# Altium PCB 175-00003, rev 2, Sinistro ASP.PcbDoc (part 4 of 5)
Units mil, origin at the board's own origin, x right, y up, seen from the top; angles counter-clockwise.
Board outline 5905.51 x 4330.71 mil, 8 copper layers (Top Layer (.GTL), MidLayer1 (.G1), +28V and VCC (.GP1), A and D grounds (.GP2), Earth GND (.GP3), +5ANA (.GP4), -5ANA (.GP5), Bottom Layer (.GBL)); 381 components, 275 nets, 1751 pads, 519 vias.
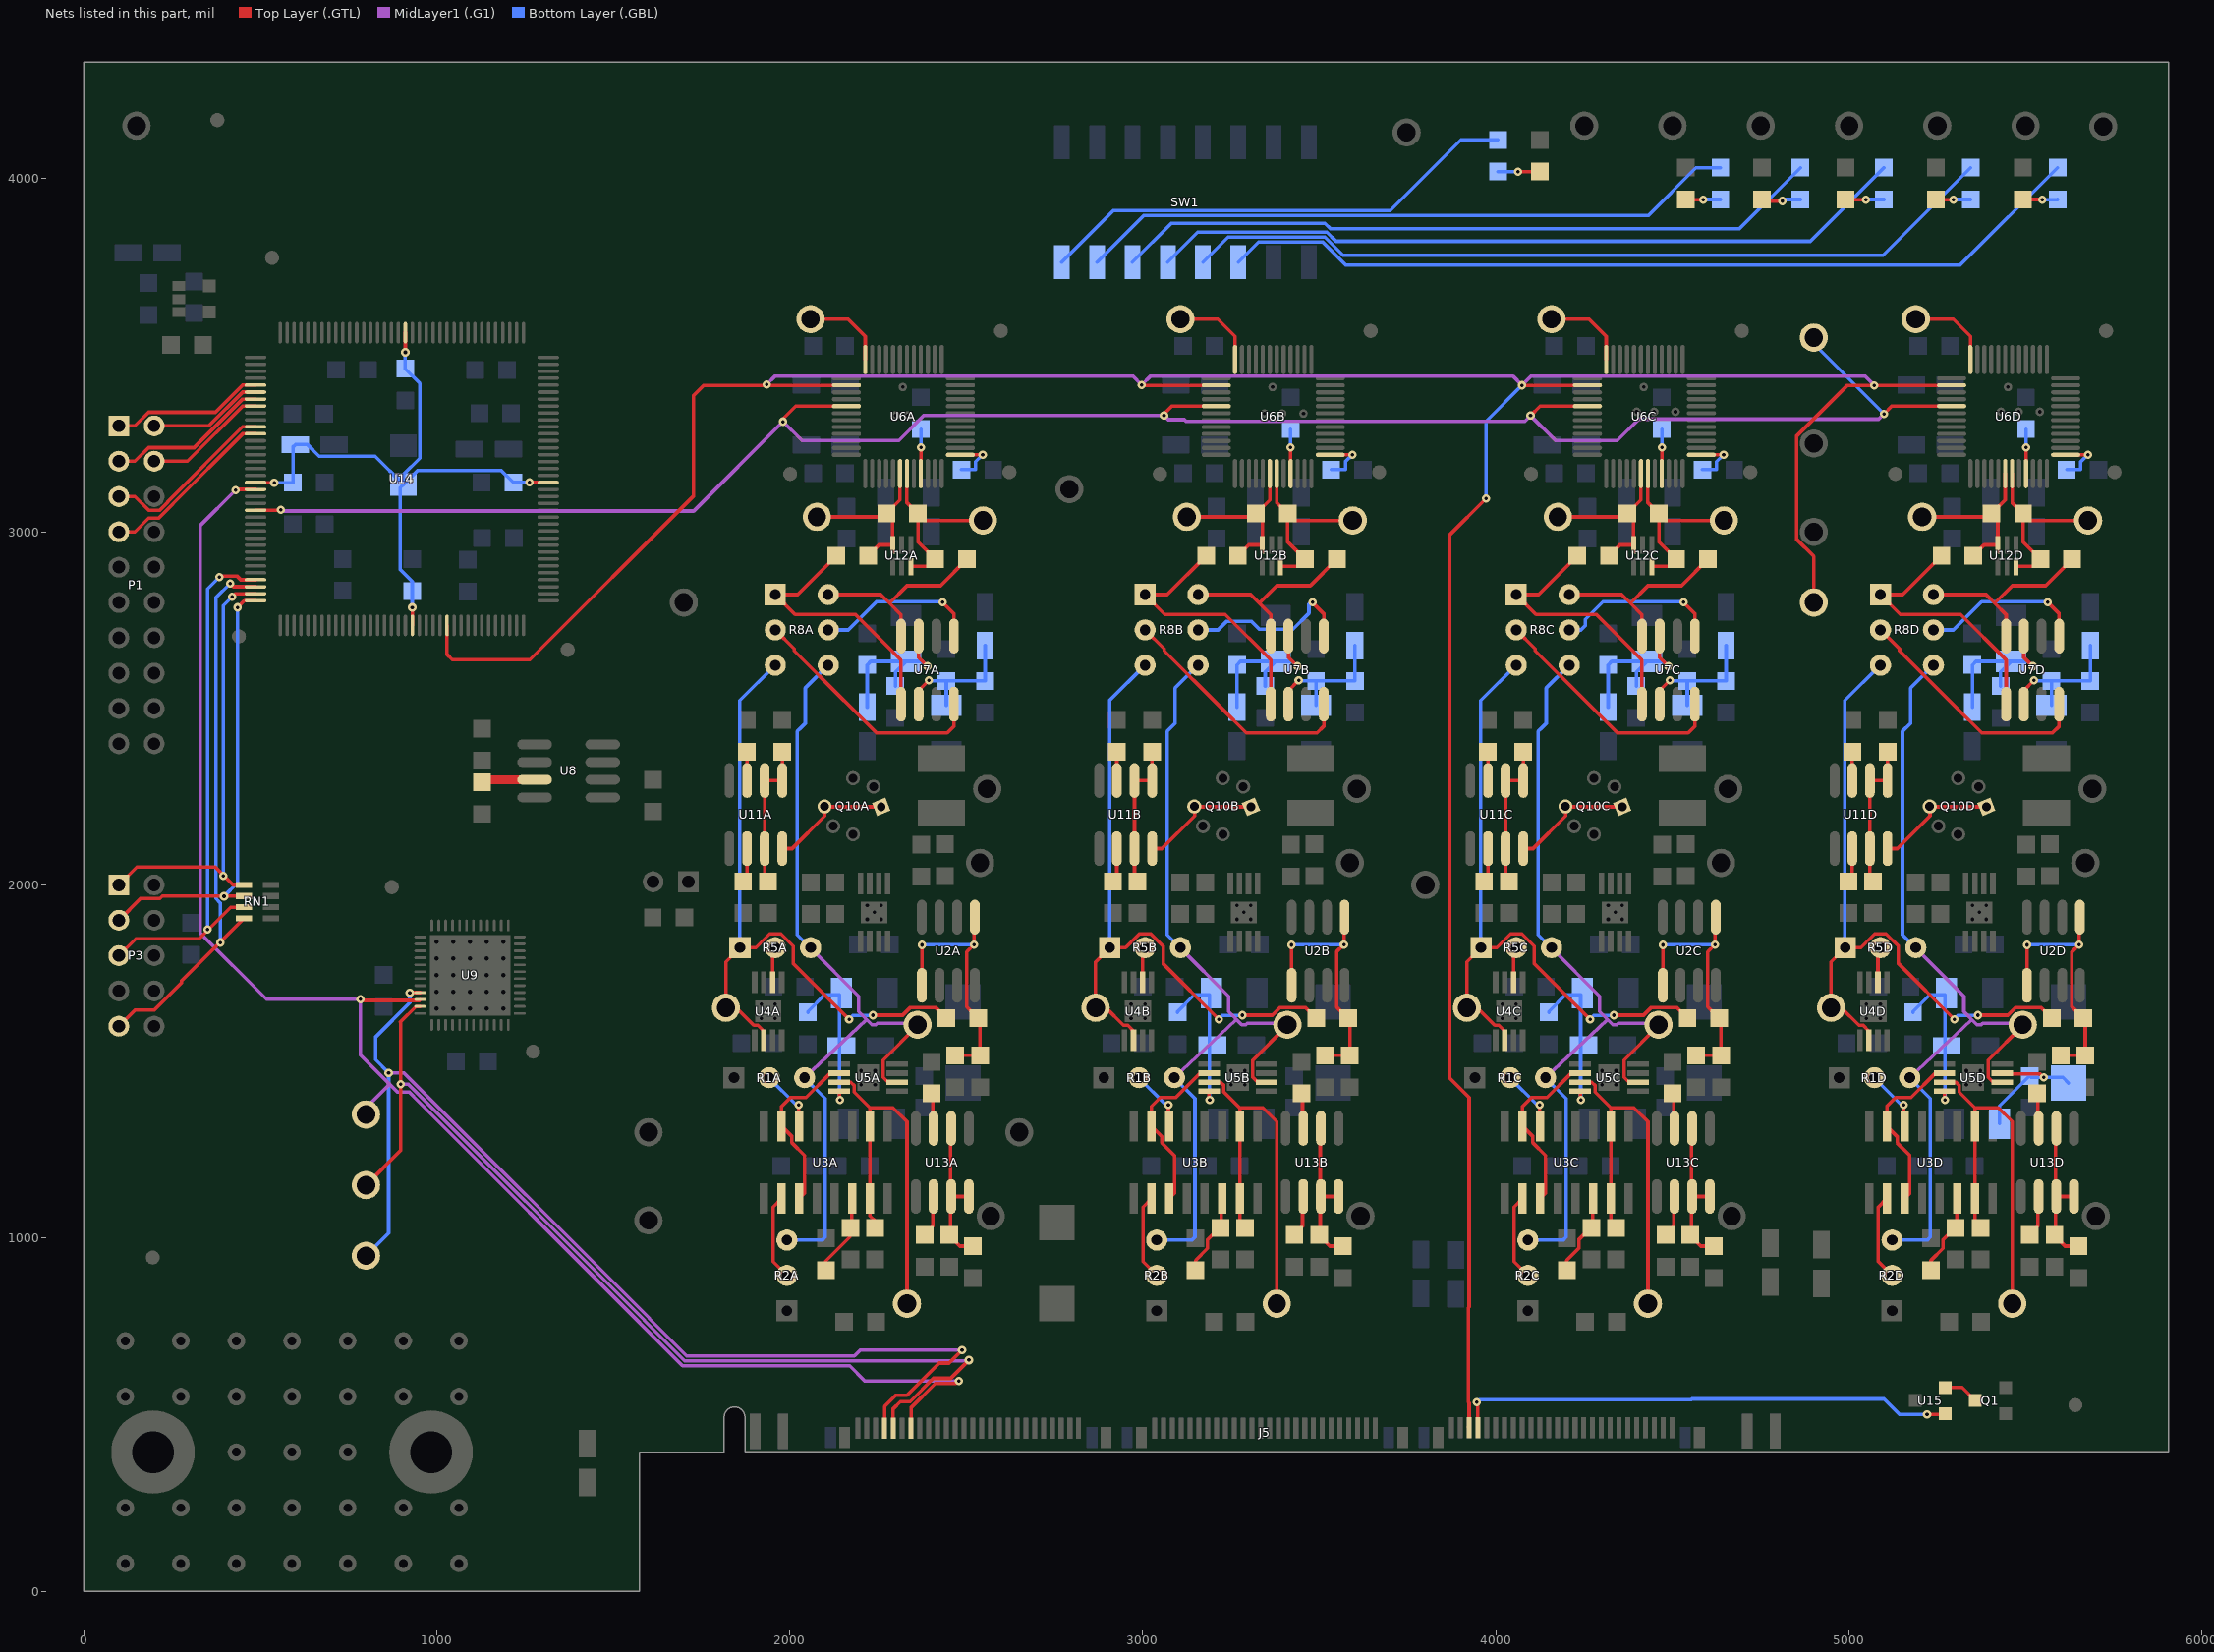
[diagram p10: the nets of this part, all layers, seen from the top]

## Via types
v1: diameter 24, hole 10, Top Layer (.GTL) to Bottom Layer (.GBL), tented both sides, 519 vias

## Nets (pads, with @x,y where several pads share a name; then routed paths per layer and width w, separated by ;. In a path a pad name is that pad's centre, name@x,y a point inside that pad or via, vN(x,y) a via of type N, cw(c..) or ccw(c..) an arc to the next point about the centre after c; other vN are vias at no path point) (continued)
NetC9D_1: C9D.1 C10D.POS L1D.1 U5D.7 | length 412.7
  Top Layer (.GTL) w10: U5D.7@5433.71,1467.12 5435.5,1465.32 5541.02,1465.32 v1(5551.02,1455.32)
  MidLayer1 (.G1) w10: v1@5550.28,1455.05 5551.28,1455.05 v1@5550.28,1455.05
  Bottom Layer (.GBL) w10: L1D.1@5426.28,1324.05 5426.28,1374.05 C9D.1@5511.28,1459.05 5515.28,1455.05 5550.28,1455.05 5551.28,1455.05 5605.28,1455.05 C10D.POS@5621.28,1439.05
NetC12A_2: C12A.2 R13A.1 U3A.14 | length 234.9
  Top Layer (.GTL) w10: R13A.1@2102.09,909.32 2102.09,935.09 2170.09,1003.09 C12A.2@2170.09,1029.32 ; C12A.2@2172.09,1029.32 C12A.2@2170.09,1029.32 ; U3A.14@2175.09,1111.96 2175.09,1034.32 C12A.2@2170.09,1029.32
NetC12B_2: C12B.2 R13B.1 U3B.14 | length 234.9
  Top Layer (.GTL) w10: R13B.1@3149.34,909.32 3149.34,936.59 3183.34,970.59 3183.34,995.32 C12B.2@3217.34,1029.32 ; C12B.2@3219.34,1029.32 C12B.2@3217.34,1029.32 ; U3B.14@3222.34,1111.96 3222.34,1034.32 C12B.2@3217.34,1029.32
NetC12C_2: C12C.2 R13C.1 U3C.14 | length 234.9
  Top Layer (.GTL) w10: R13C.1@4200.52,909.32 4200.52,936.59 4234.52,970.59 4234.52,995.32 C12C.2@4268.52,1029.32 ; C12C.2@4270.52,1029.32 C12C.2@4268.52,1029.32 ; U3C.14@4273.52,1111.96 4273.52,1034.32 C12C.2@4268.52,1029.32
NetC12D_2: C12D.2 R13D.1 U3D.14 | length 234.9
  Top Layer (.GTL) w10: R13D.1@5232.02,909.32 5232.02,936.59 5266.02,970.59 5266.02,995.32 C12D.2@5300.02,1029.32 ; C12D.2@5302.02,1029.32 C12D.2@5300.02,1029.32 ; U3D.14@5305.02,1111.96 5305.02,1034.32 C12D.2@5300.02,1029.32
NetC13A_2: C13A.2 C15A.2 L2A.1 U5A.4 | length 435.8
  Top Layer (.GTL) w10: U5A.4@2140.4,1415.94 2140.4,1393.01 v1(2142.09,1391.32)
  Bottom Layer (.GBL) w10: C13A.2@2051.36,1639.05 2051.36,1642.05 2098.36,1689.05 2141.36,1689.05 v1@2141.36,1391.05
NetC13B_2: C13B.2 C15B.2 L2B.1 U5B.4 | length 435.8
  Top Layer (.GTL) w10: U5B.4@3187.65,1415.94 3187.65,1393.01 v1(3189.34,1391.32)
  Bottom Layer (.GBL) w10: C13B.2@3098.61,1639.05 3098.61,1642.05 3145.61,1689.05 3188.61,1689.05 v1@3188.61,1391.05
NetC13C_2: C13C.2 C15C.2 L2C.1 U5C.4 | length 435.8
  Top Layer (.GTL) w10: U5C.4@4238.83,1415.94 4238.83,1393.01 v1(4240.52,1391.32)
  Bottom Layer (.GBL) w10: C13C.2@4149.79,1639.05 4149.79,1642.05 4196.79,1689.05 4239.79,1689.05 v1@4239.79,1391.05
NetC13D_2: C13D.2 C15D.2 L2D.1 U5D.4 | length 435.8
  Top Layer (.GTL) w10: U5D.4@5270.32,1415.94 5270.32,1393.01 v1(5272.02,1391.32)
  Bottom Layer (.GBL) w10: C13D.2@5181.28,1639.05 5181.28,1642.05 5228.28,1689.05 5271.28,1689.05 v1@5271.28,1391.05
NetC16A_1: C16A.1 C18A.1 C19A.1 L3A.2 U7A.3 | length 478.2
  Top Layer (.GTL) w10: U7A.3@2365.09,2704.78 2365.09,2644.32 v1(2390.09,2619.32)
  Bottom Layer (.GBL) w10: C16A.1@2219.36,2503.05 C19A.1@2219.36,2623.05 2229.36,2633.05 L3A.2@2329.36,2633.05 ; C18A.1@2299.36,2563.05 2299.36,2603.05 L3A.2@2329.36,2633.05 ; v1@2389.36,2619.05 2375.36,2633.05 L3A.2@2329.36,2633.05
NetC16B_1: C16B.1 C18B.1 C19B.1 L3B.2 U7B.3 | length 478.2
  Top Layer (.GTL) w10: U7B.3@3412.34,2704.78 3412.34,2644.32 v1(3437.34,2619.32)
  Bottom Layer (.GBL) w10: C16B.1@3266.61,2503.05 C19B.1@3266.61,2623.05 3276.61,2633.05 L3B.2@3376.61,2633.05 ; C18B.1@3346.61,2563.05 3346.61,2603.05 L3B.2@3376.61,2633.05 ; v1@3436.61,2619.05 3422.61,2633.05 L3B.2@3376.61,2633.05
NetC16C_1: C16C.1 C18C.1 C19C.1 L3C.2 U7C.3 | length 478.2
  Top Layer (.GTL) w10: U7C.3@4463.52,2704.78 4463.52,2644.32 v1(4488.52,2619.32)
  Bottom Layer (.GBL) w10: C16C.1@4317.79,2503.05 C19C.1@4317.79,2623.05 4327.79,2633.05 L3C.2@4427.79,2633.05 ; C18C.1@4397.79,2563.05 4397.79,2603.05 L3C.2@4427.79,2633.05 ; v1@4487.79,2619.05 4473.79,2633.05 L3C.2@4427.79,2633.05
NetC16D_1: C16D.1 C18D.1 C19D.1 L3D.2 U7D.3 | length 478.2
  Top Layer (.GTL) w10: U7D.3@5495.02,2704.78 5495.02,2644.32 v1(5520.02,2619.32)
  Bottom Layer (.GBL) w10: C16D.1@5349.28,2503.05 C19D.1@5349.28,2623.05 5359.28,2633.05 L3D.2@5459.28,2633.05 ; C18D.1@5429.28,2563.05 5429.28,2603.05 L3D.2@5459.28,2633.05 ; v1@5519.28,2619.05 5505.28,2633.05 L3D.2@5459.28,2633.05
NetC17A_2: C17A.2 R14A.1 U13A.2 U13A.7 U13A.8 | length 435.8
  Top Layer (.GTL) w10: U13A.2@2455.09,1310.78 U13A.7@2455.09,1117.87 ; U13A.8@2505.09,1117.87 U13A.7@2455.09,1117.87 ; C17A.2@2519.09,977.32 2482.09,977.32 2450.09,1009.32 2455.09,1014.32 U13A.7@2455.09,1117.87
NetC17B_2: C17B.2 R14B.1 U13B.2 U13B.7 U13B.8 | length 435.8
  Top Layer (.GTL) w10: U13B.2@3502.34,1310.78 U13B.7@3502.34,1117.87 ; U13B.8@3552.34,1117.87 U13B.7@3502.34,1117.87 ; C17B.2@3566.34,977.32 3529.34,977.32 3497.34,1009.32 3502.34,1014.32 U13B.7@3502.34,1117.87
NetC17C_2: C17C.2 R14C.1 U13C.2 U13C.7 U13C.8 | length 435.8
  Top Layer (.GTL) w10: U13C.2@4553.52,1310.78 U13C.7@4553.52,1117.87 ; U13C.8@4603.52,1117.87 U13C.7@4553.52,1117.87 ; C17C.2@4617.52,977.32 4580.52,977.32 4548.52,1009.32 4553.52,1014.32 U13C.7@4553.52,1117.87
NetC17D_2: C17D.2 R14D.1 U13D.2 U13D.7 U13D.8 | length 435.8
  Top Layer (.GTL) w10: U13D.2@5585.02,1310.78 U13D.7@5585.02,1117.87 ; U13D.8@5635.02,1117.87 U13D.7@5585.02,1117.87 ; C17D.2@5649.02,977.32 5612.02,977.32 5580.02,1009.32 5585.02,1014.32 U13D.7@5585.02,1117.87
NetC22A_2: C22A.2 U6A.9 | length 126.7
  Top Layer (.GTL) w10: U6A.9@2371.31,3164.9 v1(2371.31,3239.53)
  Bottom Layer (.GBL) w10: v1@2370.57,3239.27 2371.36,3240.05 C22A.2@2371.36,3291.05
NetC22B_2: C22B.2 U6B.9 | length 126.7
  Top Layer (.GTL) w10: U6B.9@3418.55,3164.9 v1(3418.55,3239.53)
  Bottom Layer (.GBL) w10: v1@3417.82,3239.27 3418.61,3240.05 C22B.2@3418.61,3291.05
NetC22C_2: C22C.2 U6C.9 | length 126.7
  Top Layer (.GTL) w10: U6C.9@4469.73,3164.9 v1(4469.73,3239.53)
  Bottom Layer (.GBL) w10: v1@4469,3239.27 4469.79,3240.05 C22C.2@4469.79,3291.05
NetC22D_2: C22D.2 U6D.9 | length 126.7
  Top Layer (.GTL) w10: U6D.9@5501.23,3164.9 v1(5501.23,3239.53)
  Bottom Layer (.GBL) w10: v1@5500.5,3239.27 5501.28,3240.05 C22D.2@5501.28,3291.05
NetC23A_2: C23A.2 U6A.13 | length 171.6
  Top Layer (.GTL) w10: U6A.13@2483.51,3218.05 v1(2546.36,3218.05)
  Bottom Layer (.GBL) w10: C23A.2@2505.36,3176.05 C23A.2@2486.36,3176.05 2526.36,3176.05 2526.36,3198.52 v1@2545.63,3217.79
NetC23B_2: C23B.2 U6B.13 | length 171.6
  Top Layer (.GTL) w10: U6B.13@3530.76,3218.05 v1(3593.61,3218.05)
  Bottom Layer (.GBL) w10: C23B.2@3552.61,3176.05 C23B.2@3533.61,3176.05 3573.61,3176.05 3573.61,3198.52 v1@3592.87,3217.79
NetC23C_2: C23C.2 U6C.13 | length 171.6
  Top Layer (.GTL) w10: U6C.13@4581.94,3218.05 v1(4644.79,3218.05)
  Bottom Layer (.GBL) w10: C23C.2@4603.79,3176.05 C23C.2@4584.79,3176.05 4624.79,3176.05 4624.79,3198.52 v1@4644.05,3217.79
NetC23D_2: C23D.2 U6D.13 | length 171.6
  Top Layer (.GTL) w10: U6D.13@5613.43,3218.05 v1(5676.28,3218.05)
  Bottom Layer (.GBL) w10: C23D.2@5635.28,3176.05 C23D.2@5616.28,3176.05 5656.28,3176.05 5656.28,3198.52 v1@5675.55,3217.79
NetC26A_1: C26A.1 C28A.1 C31A.2 L4A.2 U7A.6 | length 409.9
  Top Layer (.GTL) w10: U7A.6@2365.09,2511.87 2365.09,2550.32 v1(2394.09,2579.32)
  Bottom Layer (.GBL) w10: v1@2393.36,2579.05 2394.36,2578.05 C28A.1@2443.36,2578.05 ; L4A.2@2443.36,2508.05 C28A.1@2443.36,2578.05 ; C31A.2@2553.36,2678.05 C26A.1@2553.36,2578.05 C28A.1@2443.36,2578.05
NetC26B_1: C26B.1 C28B.1 C31B.2 L4B.2 U7B.6 | length 409.9
  Top Layer (.GTL) w10: U7B.6@3412.34,2511.87 3412.34,2550.32 v1(3441.34,2579.32)
  Bottom Layer (.GBL) w10: v1@3440.61,2579.05 3441.61,2578.05 C28B.1@3490.61,2578.05 ; L4B.2@3490.61,2508.05 C28B.1@3490.61,2578.05 ; C31B.2@3600.61,2678.05 C26B.1@3600.61,2578.05 C28B.1@3490.61,2578.05
NetC26C_1: C26C.1 C28C.1 C31C.2 L4C.2 U7C.6 | length 409.9
  Top Layer (.GTL) w10: U7C.6@4463.52,2511.87 4463.52,2550.32 v1(4492.52,2579.32)
  Bottom Layer (.GBL) w10: v1@4491.79,2579.05 4492.79,2578.05 C28C.1@4541.79,2578.05 ; L4C.2@4541.79,2508.05 C28C.1@4541.79,2578.05 ; C31C.2@4651.79,2678.05 C26C.1@4651.79,2578.05 C28C.1@4541.79,2578.05
NetC26D_1: C26D.1 C28D.1 C31D.2 L4D.2 U7D.6 | length 409.9
  Top Layer (.GTL) w10: U7D.6@5495.02,2511.87 5495.02,2550.32 v1(5524.02,2579.32)
  Bottom Layer (.GBL) w10: v1@5523.28,2579.05 5524.28,2578.05 C28D.1@5573.28,2578.05 ; L4D.2@5573.28,2508.05 C28D.1@5573.28,2578.05 ; C31D.2@5683.28,2678.05 C26D.1@5683.28,2578.05 C28D.1@5573.28,2578.05
NetC40_2: C40.2 C41.2 C42.2 C43.2 C45.1 L5.1 U14.19 U14.56 U14.90 U14.126 | length 1894.1
  Top Layer (.GTL) w10: U14.19@487.21,3139.76 487.97,3139 v1(540,3139) ; v1(911.42,3508.42) U14.126@911.42,3563.98 ; v1(931,2786) 931.1,2785.9 U14.56@931.1,2735.24 ; v1@1263.24,3139.76 v1(1263,3140) 1315.71,3140 U14.90@1315.95,3139.76
  Bottom Layer (.GBL) w10: v1(540,3139) C40.2@593,3139 593,3240 C45.1@600,3247 634.27,3247 667.27,3214 826,3214 L5.1@906,3134 ; v1(911.42,3508.42) 911,3508 C41.2@911,3462 952.5,3420.5 952.5,3208.77 906,3162.27 L5.1@906,3134 ; v1(931,2786) C42.2@931,2832 931,2859.27 897,2893.27 897,3125 L5.1@906,3134 ; v1(1263,3140) C43.2@1217,3140 1183,3174 946,3174 L5.1@906,3134
NetC46A_2: C46A.2 R12A.2 U11A.1 U11A.2 U11A.7 | length 464.3
  Top Layer (.GTL) w10: U11A.7@1929.09,2059.32 U11A.7@1929.09,2102.87 ; C46A.2@1938.09,2010.32 1929.09,2019.32 U11A.7@1929.09,2102.87 ; R12A.2@1979.09,2377.32 U11A.1@1979.09,2295.78 U11A.2@1929.09,2295.78 U11A.7@1929.09,2102.87
NetC46B_2: C46B.2 R12B.2 U11B.1 U11B.2 U11B.7 | length 464.3
  Top Layer (.GTL) w10: U11B.7@2976.34,2059.32 U11B.7@2976.34,2102.87 ; C46B.2@2985.34,2010.32 2976.34,2019.32 U11B.7@2976.34,2102.87 ; R12B.2@3026.34,2377.32 U11B.1@3026.34,2295.78 U11B.2@2976.34,2295.78 U11B.7@2976.34,2102.87
NetC46C_2: C46C.2 R12C.2 U11C.1 U11C.2 U11C.7 | length 464.3
  Top Layer (.GTL) w10: U11C.7@4027.52,2059.32 U11C.7@4027.52,2102.87 ; C46C.2@4036.52,2010.32 4027.52,2019.32 U11C.7@4027.52,2102.87 ; R12C.2@4077.52,2377.32 U11C.1@4077.52,2295.78 U11C.2@4027.52,2295.78 U11C.7@4027.52,2102.87
NetC46D_2: C46D.2 R12D.2 U11D.1 U11D.2 U11D.7 | length 464.3
  Top Layer (.GTL) w10: U11D.7@5059.02,2059.32 U11D.7@5059.02,2102.87 ; C46D.2@5068.02,2010.32 5059.02,2019.32 U11D.7@5059.02,2102.87 ; R12D.2@5109.02,2377.32 U11D.1@5109.02,2295.78 U11D.2@5059.02,2295.78 U11D.7@5059.02,2102.87
NetC49A_1: C49A.1 R18A.2 TP6A.1 U6A.6 U12A.6 | length 507.7
  Top Layer (.GTL) w10: TP6A.1@2077.09,3042.32 2264.09,3042.32 C49A.1@2273.09,3051.32 ; R18A.2@2222.09,2932.32 2252.61,2962.83 U12A.6@2291.5,2962.83 2291.5,3032.91 C49A.1@2273.09,3051.32 ; U6A.6@2312.25,3164.9 2312.25,3090.48 C49A.1@2273.09,3051.32
NetC49A_2: C49A.2 R19A.2 TP7A.1 U6A.7 U12A.3 | length 545.6
  Top Layer (.GTL) w10: U6A.7@2331.94,3164.9 2331.94,3082.48 C49A.2@2363.09,3051.32 ; U12A.3@2342.68,2901.81 2391.58,2901.81 R19A.2@2412.09,2922.32 2363.09,2971.32 C49A.2@2363.09,3051.32 ; TP7A.1@2547.09,3032.32 2382.09,3032.32 C49A.2@2363.09,3051.32
NetC49B_1: C49B.1 R18B.2 TP6B.1 U6B.6 U12B.6 | length 507.7
  Top Layer (.GTL) w10: TP6B.1@3124.34,3042.32 3311.34,3042.32 C49B.1@3320.34,3051.32 ; R18B.2@3269.34,2932.32 3299.85,2962.83 U12B.6@3338.75,2962.83 3338.75,3032.91 C49B.1@3320.34,3051.32 ; U6B.6@3359.5,3164.9 3359.5,3090.48 C49B.1@3320.34,3051.32
NetC49B_2: C49B.2 R19B.2 TP7B.1 U6B.7 U12B.3 | length 545.6
  Top Layer (.GTL) w10: U6B.7@3379.18,3164.9 3379.18,3082.48 C49B.2@3410.34,3051.32 ; U12B.3@3389.93,2901.81 3438.83,2901.81 R19B.2@3459.34,2922.32 3410.34,2971.32 C49B.2@3410.34,3051.32 ; TP7B.1@3594.34,3032.32 3429.34,3032.32 C49B.2@3410.34,3051.32
NetC49C_1: C49C.1 R18C.2 TP6C.1 U6C.6 U12C.6 | length 507.7
  Top Layer (.GTL) w10: TP6C.1@4175.52,3042.32 4362.52,3042.32 C49C.1@4371.52,3051.32 ; R18C.2@4320.52,2932.32 4351.03,2962.83 U12C.6@4389.93,2962.83 4389.93,3032.91 C49C.1@4371.52,3051.32 ; U6C.6@4410.68,3164.9 4410.68,3090.48 C49C.1@4371.52,3051.32
NetC49C_2: C49C.2 R19C.2 TP7C.1 U6C.7 U12C.3 | length 545.6
  Top Layer (.GTL) w10: U6C.7@4430.36,3164.9 4430.36,3082.48 C49C.2@4461.52,3051.32 ; U12C.3@4441.11,2901.81 4490.01,2901.81 R19C.2@4510.52,2922.32 4461.52,2971.32 C49C.2@4461.52,3051.32 ; TP7C.1@4645.52,3032.32 4480.52,3032.32 C49C.2@4461.52,3051.32
NetC49D_1: C49D.1 R18D.2 TP6D.1 U6D.6 U12D.6 | length 507.7
  Top Layer (.GTL) w10: TP6D.1@5207.02,3042.32 5394.02,3042.32 C49D.1@5403.02,3051.32 ; R18D.2@5352.02,2932.32 5382.53,2962.83 U12D.6@5421.42,2962.83 5421.42,3032.91 C49D.1@5403.02,3051.32 ; U6D.6@5442.17,3164.9 5442.17,3090.48 C49D.1@5403.02,3051.32
NetC49D_2: C49D.2 R19D.2 TP7D.1 U6D.7 U12D.3 | length 545.6
  Top Layer (.GTL) w10: U6D.7@5461.86,3164.9 5461.86,3082.48 C49D.2@5493.02,3051.32 ; U12D.3@5472.61,2901.81 5521.5,2901.81 R19D.2@5542.02,2922.32 5493.02,2971.32 C49D.2@5493.02,3051.32 ; TP7D.1@5677.02,3032.32 5512.02,3032.32 C49D.2@5493.02,3051.32
NetC61_2: C61.2 U8.3 | length 151.4
  Top Layer (.GTL) w25: C61.2@1129,2291 1136,2298 U8.3@1277.54,2298
NetD1_ANOD: D1.ANOD R25.2 | length 105.8
  Top Layer (.GTL) w10: D1.ANOD@4758.15,3937.01 v1(4811.02,3937.01)
  Bottom Layer (.GBL) w10: v1(4811.02,3937.01) 4815.24,3941.22 R25.2@4862.2,3941.22
NetD2_ANOD: D2.ANOD R26.2 | length 98.3
  Top Layer (.GTL) w10: D2.ANOD@5246.34,3940.94 v1(5295.28,3940.94)
  Bottom Layer (.GBL) w10: v1(5295.28,3940.94) 5295.55,3941.22 R26.2@5344.49,3941.22
NetD3_CATH: D3.CATH R22.2 | length 118.3
  Top Layer (.GTL) w10: v1(4062.99,4019.69) 4063.27,4019.96 D3.CATH@4124.02,4019.96
  Bottom Layer (.GBL) w10: R22.2@4005.91,4019.96 4062.72,4019.96 v1(4062.99,4019.69)
NetD4_CATH: D4.CATH R23.2 | length 98.7
  Top Layer (.GTL) w10: D4.CATH@4537.4,3941.22 4537.68,3940.94 v1(4586.61,3940.94)
  Bottom Layer (.GBL) w10: v1(4586.61,3940.94) 4586.89,3941.22 R23.2@4635.83,3941.22
NetD5_CATH: D5.CATH R24.2 | length 108.1
  Top Layer (.GTL) w10: D5.CATH@4990.43,3940.94 v1(5047.24,3940.94)
  Bottom Layer (.GBL) w10: v1(5047.24,3940.94) 5047.52,3941.22 R24.2@5098.43,3941.22
NetD6_CATH: D6.CATH R27.2 | length 98.7
  Top Layer (.GTL) w10: D6.CATH@5492.13,3941.22 5546.97,3941.22 v1(5547.24,3940.94)
  Bottom Layer (.GBL) w10: v1(5547.24,3940.94) 5590.28,3940.94 R27.2@5590.55,3941.22
NetQ1_3: Q1.3 U15.2 | length 99.3
  Top Layer (.GTL) w10: U15.2@5273,577 5320,577 Q1.3@5357,540
NetQ10A_1: Q10A.1 Q10A.5 U11A.8 | length 346
  Top Layer (.GTL) w10: U11A.8@1981.01,2102.87 U11A.8@1979.09,2102.87 2006.64,2102.87 2099.47,2195.7 2099.47,2221.32 Q10A.1@2259.09,2221.32
NetQ10B_1: Q10B.1 Q10B.5 U11B.8 | length 346
  Top Layer (.GTL) w10: U11B.8@3028.26,2102.87 U11B.8@3026.34,2102.87 3053.88,2102.87 3146.72,2195.7 3146.72,2221.32 Q10B.1@3306.34,2221.32
NetQ10C_1: Q10C.1 Q10C.5 U11C.8 | length 346
  Top Layer (.GTL) w10: U11C.8@4079.44,2102.87 U11C.8@4077.52,2102.87 4105.06,2102.87 4197.9,2195.7 4197.9,2221.32 Q10C.1@4357.52,2221.32
NetQ10D_1: Q10D.1 Q10D.5 U11D.8 | length 346
  Top Layer (.GTL) w10: U11D.8@5110.94,2102.87 U11D.8@5109.02,2102.87 5136.56,2102.87 5229.39,2195.7 5229.39,2221.32 Q10D.1@5389.02,2221.32
NetR1A_2: R1A.2 U3A.6 | length 173.5
  Top Layer (.GTL) w10: U3A.6@2025.09,1318.68 v1(2025.09,1377.32)
  Bottom Layer (.GBL) w10: R1A.2@1941.36,1454.05 2018.36,1377.05 v1@2024.36,1377.05
NetR1A_3: R1A.3 R2A.3 R5A.3 R8A.4 TP3A.1 U5A.6 | length 2336.9
  Top Layer (.GTL) w10: U5A.6@2303.79,1441.53 2278.26,1441.53 2264.28,1455.52 2264.28,1504.31 2362.09,1602.13 TP3A.1@2362.09,1604.32
  MidLayer1 (.G1) w10: R1A.3@2041.36,1454.05 2216.54,1618.11 ; R5A.3@2058.36,1822.05 2195.36,1685.05 2195.36,1641.36 2232.66,1604.05 2244.13,1604.05 2248.4,1608.32 2357.09,1608.32 TP3A.1@2361.36,1604.05
  Bottom Layer (.GBL) w10: R2A.3@1991.36,994.05 2091.36,994.05 2100.36,1003.05 2100.36,1395.05 R1A.3@2041.36,1454.05 ; R5A.3@2058.36,1822.05 2021.36,1859.05 2021.36,2435.36 2031.33,2445.32 2031.79,2445.32 2044.09,2457.62 2044.09,2557.79 R8A.4@2108.36,2622.05
  other v1: 2109.09,2622.32
NetR1B_2: R1B.2 U3B.6 | length 173.5
  Top Layer (.GTL) w10: U3B.6@3072.34,1318.68 v1(3072.34,1377.32)
  Bottom Layer (.GBL) w10: R1B.2@2988.61,1454.05 3065.61,1377.05 v1@3071.61,1377.05
NetR1B_3: R1B.3 R2B.3 R5B.3 R8B.4 TP3B.1 U5B.6 | length 2336.9
  Top Layer (.GTL) w10: U5B.6@3351.03,1441.53 3325.51,1441.53 3311.52,1455.52 3311.52,1504.31 3409.34,1602.13 TP3B.1@3409.34,1604.32
  MidLayer1 (.G1) w10: R1B.3@3088.61,1454.05 3263.78,1618.11 ; R5B.3@3105.61,1822.05 3242.61,1685.05 3242.61,1641.36 3279.91,1604.05 3291.37,1604.05 3295.64,1608.32 3404.34,1608.32 TP3B.1@3408.61,1604.05
  Bottom Layer (.GBL) w10: R2B.3@3038.61,994.05 3138.61,994.05 3147.61,1003.05 3147.61,1395.05 R1B.3@3088.61,1454.05 ; R5B.3@3105.61,1822.05 3068.61,1859.05 3068.61,2435.36 3078.57,2445.32 3079.04,2445.32 3091.34,2457.62 3091.34,2557.79 R8B.4@3155.61,2622.05
NetR1C_2: R1C.2 U3C.6 | length 173.5
  Top Layer (.GTL) w10: U3C.6@4123.52,1318.68 v1(4123.52,1377.32)
  Bottom Layer (.GBL) w10: R1C.2@4039.79,1454.05 4116.79,1377.05 v1@4122.79,1377.05
NetR1C_3: R1C.3 R2C.3 R5C.3 R8C.4 TP3C.1 U5C.6 | length 2336.9
  Top Layer (.GTL) w10: U5C.6@4402.21,1441.53 4376.69,1441.53 4362.7,1455.52 4362.7,1504.31 4460.52,1602.13 TP3C.1@4460.52,1604.32
  MidLayer1 (.G1) w10: R1C.3@4139.79,1454.05 4314.96,1618.11 ; R5C.3@4156.79,1822.05 4293.79,1685.05 4293.79,1641.36 4331.09,1604.05 4342.55,1604.05 4346.82,1608.32 4455.52,1608.32 TP3C.1@4459.79,1604.05
  Bottom Layer (.GBL) w10: R2C.3@4089.79,994.05 4189.79,994.05 4198.79,1003.05 4198.79,1395.05 R1C.3@4139.79,1454.05 ; R5C.3@4156.79,1822.05 4119.79,1859.05 4119.79,2435.36 4129.75,2445.32 4130.22,2445.32 4142.52,2457.62 4142.52,2557.79 R8C.4@4206.79,2622.05
NetR1D_2: R1D.2 U3D.6 | length 173.5
  Top Layer (.GTL) w10: U3D.6@5155.02,1318.68 v1(5155.02,1377.32)
  Bottom Layer (.GBL) w10: R1D.2@5071.28,1454.05 5148.28,1377.05 v1@5154.28,1377.05
NetR1D_3: R1D.3 R2D.3 R5D.3 R8D.4 TP3D.1 U5D.6 | length 2336.9
  Top Layer (.GTL) w10: U5D.6@5433.71,1441.53 5408.19,1441.53 5394.2,1455.52 5394.2,1504.31 5492.02,1602.13 TP3D.1@5492.02,1604.32
  MidLayer1 (.G1) w10: R1D.3@5171.28,1454.05 5346.46,1618.11 ; R5D.3@5188.28,1822.05 5325.28,1685.05 5325.28,1641.36 5362.58,1604.05 5374.05,1604.05 5378.32,1608.32 5487.02,1608.32 TP3D.1@5491.28,1604.05
  Bottom Layer (.GBL) w10: R2D.3@5121.28,994.05 5221.28,994.05 5230.28,1003.05 5230.28,1395.05 R1D.3@5171.28,1454.05 ; R5D.3@5188.28,1822.05 5151.28,1859.05 5151.28,2435.36 5161.25,2445.32 5161.71,2445.32 5174.02,2457.62 5174.02,2557.79 R8D.4@5238.28,2622.05
NetR2A_2: R2A.2 U3A.10 | length 243.7
  Top Layer (.GTL) w10: U3A.10@1977.09,1111.96 1953.09,1087.96 1953.09,933.32 R2A.2@1992.09,894.32
NetR2B_2: R2B.2 U3B.10 | length 243.7
  Top Layer (.GTL) w10: U3B.10@3024.34,1111.96 3000.34,1087.96 3000.34,933.32 R2B.2@3039.34,894.32
NetR2C_2: R2C.2 U3C.10 | length 243.7
  Top Layer (.GTL) w10: U3C.10@4075.52,1111.96 4051.52,1087.96 4051.52,933.32 R2C.2@4090.52,894.32
NetR2D_2: R2D.2 U3D.10 | length 243.7
  Top Layer (.GTL) w10: U3D.10@5107.02,1111.96 5083.02,1087.96 5083.02,933.32 R2D.2@5122.02,894.32
NetR5A_1: R5A.1 R8A.3 R9A.2 TP4A.1 U4A.6 | length 1945.2
  Top Layer (.GTL) w10: U4A.6@1926.3,1560.63 1926.3,1586.15 1910.03,1602.42 1898.16,1602.42 1848.26,1652.32 TP4A.1@1819.09,1652.32 1819.09,1782.32 R5A.1@1859.09,1822.32 1903.94,1822.32 1942.94,1861.32 1975.25,1861.32 2010.09,1826.48 2010.09,1777.32 v1(2168.09,1619.32) ; v1(2235.09,1631.32) 2319.8,1631.32 2341.8,1653.32 2413.09,1653.32 R9A.2@2444.09,1622.32
  Bottom Layer (.GBL) w10: R5A.1@1858.36,1822.05 1858.36,2522.05 R8A.3@1958.36,2622.05 ; v1@2167.36,1619.05 2179.36,1631.05 v1@2234.36,1631.05
  other v1: 1959.09,2622.32
NetR5A_2: R5A.2 U4A.2 | length 101.3
  Top Layer (.GTL) w10: U4A.2@1951.89,1724.01 1951.89,1815.12 R5A.2@1959.09,1822.32
NetR5B_1: R5B.1 R8B.3 R9B.2 TP4B.1 U4B.6 | length 1945.2
  Top Layer (.GTL) w10: U4B.6@2973.54,1560.63 2973.54,1586.15 2957.28,1602.42 2945.41,1602.42 2895.5,1652.32 TP4B.1@2866.34,1652.32 2866.34,1782.32 R5B.1@2906.34,1822.32 2951.18,1822.32 2990.18,1861.32 3022.49,1861.32 3057.34,1826.48 3057.34,1777.32 v1(3215.34,1619.32) ; v1(3282.34,1631.32) 3367.04,1631.32 3389.04,1653.32 3460.34,1653.32 R9B.2@3491.34,1622.32
  Bottom Layer (.GBL) w10: R5B.1@2905.61,1822.05 2905.61,2522.05 R8B.3@3005.61,2622.05 ; v1@3214.61,1619.05 3226.61,1631.05 v1@3281.61,1631.05
NetR5B_2: R5B.2 U4B.2 | length 101.3
  Top Layer (.GTL) w10: U4B.2@2999.13,1724.01 2999.13,1815.12 R5B.2@3006.34,1822.32
NetR5C_1: R5C.1 R8C.3 R9C.2 TP4C.1 U4C.6 | length 1945.2
  Top Layer (.GTL) w10: U4C.6@4024.72,1560.63 4024.72,1586.15 4008.46,1602.42 3996.59,1602.42 3946.68,1652.32 TP4C.1@3917.52,1652.32 3917.52,1782.32 R5C.1@3957.52,1822.32 4002.37,1822.32 4041.37,1861.32 4073.67,1861.32 4108.52,1826.48 4108.52,1777.32 v1(4266.52,1619.32) ; v1(4333.52,1631.32) 4418.22,1631.32 4440.22,1653.32 4511.52,1653.32 R9C.2@4542.52,1622.32
  Bottom Layer (.GBL) w10: R5C.1@3956.79,1822.05 3956.79,2522.05 R8C.3@4056.79,2622.05 ; v1@4265.79,1619.05 4277.79,1631.05 v1@4332.79,1631.05
NetR5C_2: R5C.2 U4C.2 | length 101.3
  Top Layer (.GTL) w10: U4C.2@4050.31,1724.01 4050.31,1815.12 R5C.2@4057.52,1822.32
NetR5D_1: R5D.1 R8D.3 R9D.2 TP4D.1 U4D.6 | length 1945.2
  Top Layer (.GTL) w10: U4D.6@5056.22,1560.63 5056.22,1586.15 5039.96,1602.42 5028.08,1602.42 4978.18,1652.32 TP4D.1@4949.02,1652.32 4949.02,1782.32 R5D.1@4989.02,1822.32 5033.86,1822.32 5072.86,1861.32 5105.17,1861.32 5140.02,1826.48 5140.02,1777.32 v1(5298.02,1619.32) ; v1(5365.02,1631.32) 5449.72,1631.32 5471.72,1653.32 5543.02,1653.32 R9D.2@5574.02,1622.32
  Bottom Layer (.GBL) w10: R5D.1@4988.28,1822.05 4988.28,2522.05 R8D.3@5088.28,2622.05 ; v1@5297.28,1619.05 5309.28,1631.05 v1@5364.28,1631.05
NetR5D_2: R5D.2 U4D.2 | length 101.3
  Top Layer (.GTL) w10: U4D.2@5081.81,1724.01 5081.81,1815.12 R5D.2@5089.02,1822.32
NetR6A_1: R6A.1 R7A.1 R9A.1 U2A.1 U2A.5 | length 749.4
  Top Layer (.GTL) w10: U2A.5@2374.09,1715.87 v1(2374.09,1830.32) ; R6A.1@2469.09,1517.32 R7A.1@2539.09,1517.32 2539.09,1617.32 R9A.1@2534.09,1622.32 2501.31,1655.1 2501.31,1810.54 v1(2522.09,1831.32) 2522.09,1906.78 U2A.1@2524.09,1908.78
  Bottom Layer (.GBL) w10: v1@2373.36,1830.05 2374.36,1831.05 v1@2521.36,1831.05
NetR6B_1: R6B.1 R7B.1 R9B.1 U2B.1 U2B.5 | length 749.4
  Top Layer (.GTL) w10: U2B.5@3421.34,1715.87 v1(3421.34,1830.32) ; R6B.1@3516.34,1517.32 R7B.1@3586.34,1517.32 3586.34,1617.32 R9B.1@3581.34,1622.32 3548.56,1655.1 3548.56,1810.54 v1(3569.34,1831.32) 3569.34,1906.78 U2B.1@3571.34,1908.78
  Bottom Layer (.GBL) w10: v1@3420.61,1830.05 3421.61,1831.05 v1@3568.61,1831.05
NetR6C_1: R6C.1 R7C.1 R9C.1 U2C.1 U2C.5 | length 749.4
  Top Layer (.GTL) w10: U2C.5@4472.52,1715.87 v1(4472.52,1830.32) ; R6C.1@4567.52,1517.32 R7C.1@4637.52,1517.32 4637.52,1617.32 R9C.1@4632.52,1622.32 4599.74,1655.1 4599.74,1810.54 v1(4620.52,1831.32) 4620.52,1906.78 U2C.1@4622.52,1908.78
  Bottom Layer (.GBL) w10: v1@4471.79,1830.05 4472.79,1831.05 v1@4619.79,1831.05
NetR6D_1: R6D.1 R7D.1 R9D.1 U2D.1 U2D.5 | length 749.4
  Top Layer (.GTL) w10: U2D.5@5504.02,1715.87 v1(5504.02,1830.32) ; R6D.1@5599.02,1517.32 R7D.1@5669.02,1517.32 5669.02,1617.32 R9D.1@5664.02,1622.32 5631.24,1655.1 5631.24,1810.54 v1(5652.02,1831.32) 5652.02,1906.78 U2D.1@5654.02,1908.78
  Bottom Layer (.GBL) w10: v1@5503.28,1830.05 5504.28,1831.05 v1@5651.28,1831.05
NetR8A_1: R8A.1 R18A.1 U7A.5 | length 776.5
  Top Layer (.GTL) w10: R18A.1@2132.09,2932.32 2022.09,2822.32 v1(1959.09,2822.32) 2015.09,2766.32 2185.9,2766.32 2315.09,2637.13 U7A.5@2315.09,2511.87
NetR8A_2: R8A.2 U7A.8 | length 900.1
  Top Layer (.GTL) w10: R8A.2@1959.09,2722.32 2013.09,2668.32 2013.09,2663.17 ; 2154.28,2521.98 2013.09,2663.17 ; U7A.8@2465.09,2511.87 2465.09,2449.32 2446.09,2430.32 2245.94,2430.32 2175.28,2500.98 2013.09,2663.17
NetR8A_5: R8A.5 U7A.1 | length 466.8
  Top Layer (.GTL) w10: v1(2433.09,2800.32) 2465.09,2768.32 U7A.1@2465.09,2704.78
  Bottom Layer (.GBL) w10: R8A.5@2108.36,2722.05 2165.63,2722.05 2245.63,2802.05 2430.36,2802.05 v1@2432.36,2800.05
NetR8A_6: R8A.6 R19A.1 U7A.4 | length 561.2
  Top Layer (.GTL) w10: v1(2109.09,2822.32) 2258.09,2822.32 2282.64,2797.78 ; U7A.4@2315.09,2704.78 2315.09,2765.32 2282.64,2797.78 ; R19A.1@2502.09,2922.32 2427.09,2847.32 2332.18,2847.32 2282.64,2797.78
NetR8B_1: R8B.1 R18B.1 U7B.5 | length 776.5
  Top Layer (.GTL) w10: R18B.1@3179.34,2932.32 3069.34,2822.32 R8B.1@3006.34,2822.32 3062.34,2766.32 3233.15,2766.32 3362.34,2637.13 U7B.5@3362.34,2511.87
NetR8B_2: R8B.2 U7B.8 | length 900.1
  Top Layer (.GTL) w10: R8B.2@3006.34,2722.32 3060.34,2668.32 3060.34,2663.17 ; 3201.53,2521.98 3060.34,2663.17 ; U7B.8@3512.34,2511.87 3512.34,2449.32 3493.34,2430.32 3293.18,2430.32 3222.53,2500.98 3060.34,2663.17
NetR8B_5: R8B.5 U7B.1 | length 500.6
  Top Layer (.GTL) w10: v1(3480.34,2800.32) 3512.34,2768.32 U7B.1@3512.34,2704.78
  Bottom Layer (.GBL) w10: R8B.5@3155.61,2722.05 3212.88,2722.05 3237.88,2747.05 3306.88,2747.05 3329.88,2724.05 3424.77,2724.05 3470.34,2769.62 3470.34,2794.79 3477.61,2802.05 v1@3479.61,2800.05
NetR8B_6: R8B.6 R19B.1 U7B.4 | length 561.2
  Top Layer (.GTL) w10: R8B.6@3156.34,2822.32 3305.34,2822.32 3329.88,2797.78 ; U7B.4@3362.34,2704.78 3362.34,2765.32 3329.88,2797.78 ; R19B.1@3549.34,2922.32 3474.34,2847.32 3379.42,2847.32 3329.88,2797.78
NetR8C_1: R8C.1 R18C.1 U7C.5 | length 776.5
  Top Layer (.GTL) w10: R18C.1@4230.52,2932.32 4120.52,2822.32 R8C.1@4057.52,2822.32 4113.52,2766.32 4284.33,2766.32 4413.52,2637.13 U7C.5@4413.52,2511.87
NetR8C_2: R8C.2 U7C.8 | length 900.1
  Top Layer (.GTL) w10: R8C.2@4057.52,2722.32 4111.52,2668.32 4111.52,2663.17 ; 4252.71,2521.98 4111.52,2663.17 ; U7C.8@4563.52,2511.87 4563.52,2449.32 4544.52,2430.32 4344.37,2430.32 4273.71,2500.98 4111.52,2663.17
NetR8C_5: R8C.5 U7C.1 | length 477.2
  Top Layer (.GTL) w10: v1(4531.52,2800.32) 4563.52,2768.32 U7C.1@4563.52,2704.78
  Bottom Layer (.GBL) w10: R8C.5@4206.79,2722.05 4240.86,2722.05 4253.24,2734.43 4253.24,2752.24 4303.05,2802.05 4528.79,2802.05 v1@4530.79,2800.05
NetR8C_6: R8C.6 R19C.1 U7C.4 | length 561.2
  Top Layer (.GTL) w10: R8C.6@4207.52,2822.32 4356.52,2822.32 4381.06,2797.78 ; U7C.4@4413.52,2704.78 4413.52,2765.32 4381.06,2797.78 ; R19C.1@4600.52,2922.32 4525.52,2847.32 4430.61,2847.32 4381.06,2797.78
NetR8D_1: R8D.1 R18D.1 U7D.5 | length 776.5
  Top Layer (.GTL) w10: R18D.1@5262.02,2932.32 5152.02,2822.32 R8D.1@5089.02,2822.32 5145.02,2766.32 5315.82,2766.32 5445.02,2637.13 U7D.5@5445.02,2511.87
NetR8D_2: R8D.2 U7D.8 | length 900.1
  Top Layer (.GTL) w10: R8D.2@5089.02,2722.32 5143.02,2668.32 5143.02,2663.17 ; 5284.21,2521.98 5143.02,2663.17 ; U7D.8@5595.02,2511.87 5595.02,2449.32 5576.02,2430.32 5375.86,2430.32 5305.21,2500.98 5143.02,2663.17
NetR8D_5: R8D.5 U7D.1 | length 466.8
  Top Layer (.GTL) w10: v1(5563.02,2800.32) 5595.02,2768.32 U7D.1@5595.02,2704.78
  Bottom Layer (.GBL) w10: R8D.5@5238.28,2722.05 5295.56,2722.05 5375.56,2802.05 5560.28,2802.05 v1@5562.28,2800.05
NetR8D_6: R8D.6 R19D.1 U7D.4 | length 561.2
  Top Layer (.GTL) w10: R8D.6@5239.02,2822.32 5388.02,2822.32 5412.56,2797.78 ; U7D.4@5445.02,2704.78 5445.02,2765.32 5412.56,2797.78 ; R19D.1@5632.02,2922.32 5557.02,2847.32 5462.1,2847.32 5412.56,2797.78
NetR10A_2: R10A.2 TP5A.1 U3A.2 U3A.15 U5A.3 | length 1110.2
  Top Layer (.GTL) w10: U5A.3@2140.4,1441.53 2172.98,1441.53 2182.19,1432.32 2182.19,1413.39 2227.09,1368.48 ; R10A.2@2242.09,1029.32 2242.09,1047.91 2227.09,1062.91 U3A.15@2227.09,1111.96 U3A.2@2227.09,1316.68 2227.09,1368.48 ; TP5A.1@2332.09,814.32 2332.09,1329.53 2292.63,1368.99 2261.56,1368.99 2261.05,1368.48 2227.09,1368.48
NetR10B_2: R10B.2 TP5B.1 U3B.2 U3B.15 U5B.3 | length 1110.2
  Top Layer (.GTL) w10: U5B.3@3187.65,1441.53 3220.23,1441.53 3229.43,1432.32 3229.43,1413.39 3274.34,1368.48 ; R10B.2@3289.34,1029.32 3274.34,1044.32 U3B.15@3274.34,1111.96 U3B.2@3274.34,1316.68 3274.34,1368.48 ; TP5B.1@3379.34,814.32 3379.34,1329.53 3339.88,1368.99 3308.8,1368.99 3308.29,1368.48 3274.34,1368.48
NetR10C_2: R10C.2 TP5C.1 U3C.2 U3C.15 U5C.3 | length 1110.2
  Top Layer (.GTL) w10: U5C.3@4238.83,1441.53 4271.41,1441.53 4280.61,1432.32 4280.61,1413.39 4325.52,1368.48 ; R10C.2@4340.52,1029.32 4325.52,1044.32 U3C.15@4325.52,1111.96 U3C.2@4325.52,1316.68 4325.52,1368.48 ; TP5C.1@4430.52,814.32 4430.52,1329.53 4391.06,1368.99 4359.98,1368.99 4359.47,1368.48 4325.52,1368.48
NetR10D_2: R10D.2 TP5D.1 U3D.2 U3D.15 U5D.3 | length 1110.2
  Top Layer (.GTL) w10: U5D.3@5270.32,1441.53 5302.91,1441.53 5312.11,1432.32 5312.11,1413.39 5357.02,1368.48 ; R10D.2@5372.02,1029.32 5357.02,1044.32 U3D.15@5357.02,1111.96 U3D.2@5357.02,1316.68 5357.02,1368.48 ; TP5D.1@5462.02,814.32 5462.02,1329.53 5422.55,1368.99 5391.48,1368.99 5390.97,1368.48 5357.02,1368.48
NetR15A_1: R15A.1 U11A.3 | length 81.5
  Top Layer (.GTL) w10: U11A.3@1879.09,2295.78 R15A.1@1879.09,2377.32
NetR15B_1: R15B.1 U11B.3 | length 81.5
  Top Layer (.GTL) w10: U11B.3@2926.34,2295.78 R15B.1@2926.34,2377.32
NetR15C_1: R15C.1 U11C.3 | length 81.5
  Top Layer (.GTL) w10: U11C.3@3977.52,2295.78 R15C.1@3977.52,2377.32
NetR15D_1: R15D.1 U11D.3 | length 81.5
  Top Layer (.GTL) w10: U11D.3@5009.02,2295.78 R15D.1@5009.02,2377.32
NetR16A_1: R16A.1 U11A.6 | length 114.7
  Top Layer (.GTL) w10: R16A.1@1868.09,2010.32 1879.09,2021.32 U11A.6@1879.09,2102.87 U11A.6@1879.09,2085.22
NetR16B_1: R16B.1 U11B.6 | length 114.7
  Top Layer (.GTL) w10: R16B.1@2915.34,2010.32 2926.34,2021.32 U11B.6@2926.34,2102.87 U11B.6@2926.34,2085.22
NetR16C_1: R16C.1 U11C.6 | length 114.7
  Top Layer (.GTL) w10: R16C.1@3966.52,2010.32 3977.52,2021.32 U11C.6@3977.52,2102.87 U11C.6@3977.52,2085.22
NetR16D_1: R16D.1 U11D.6 | length 114.7
  Top Layer (.GTL) w10: R16D.1@4998.02,2010.32 5009.02,2021.32 U11D.6@5009.02,2102.87 U11D.6@5009.02,2085.22
NetR17A_2: R17A.2 U13A.3 | length 107.7
  Top Layer (.GTL) w10: U13A.3@2400.09,1315.78 2405.09,1310.78 2405.09,1404.32 R17A.2@2400.09,1409.32
NetR17B_2: R17B.2 U13B.3 | length 107.7
  Top Layer (.GTL) w10: U13B.3@3447.34,1315.78 3452.34,1310.78 3452.34,1404.32 R17B.2@3447.34,1409.32
NetR17C_2: R17C.2 U13C.3 | length 107.7
  Top Layer (.GTL) w10: U13C.3@4498.52,1315.78 4503.52,1310.78 4503.52,1404.32 R17C.2@4498.52,1409.32
NetR17D_2: R17D.2 U13D.3 | length 107.7
  Top Layer (.GTL) w10: U13D.3@5530.02,1315.78 5535.02,1310.78 5535.02,1404.32 R17D.2@5530.02,1409.32
NetR20A_2: R20A.2 U13A.6 | length 118.9
  Top Layer (.GTL) w10: R20A.2@2380.09,1009.32 2405.09,1034.32 U13A.6@2405.09,1117.87
NetR20B_2: R20B.2 U13B.6 | length 118.9
  Top Layer (.GTL) w10: R20B.2@3427.34,1009.32 3452.34,1034.32 U13B.6@3452.34,1117.87
NetR20C_2: R20C.2 U13C.6 | length 118.9
  Top Layer (.GTL) w10: R20C.2@4478.52,1009.32 4503.52,1034.32 U13C.6@4503.52,1117.87
NetR20D_2: R20D.2 U13D.6 | length 118.9
  Top Layer (.GTL) w10: R20D.2@5510.02,1009.32 5535.02,1034.32 U13D.6@5535.02,1117.87
NetR22_1: R22.1 SW1.8 | length 1379.5
  Bottom Layer (.GBL) w10: SW1.8@2770.46,3763.87 2916.93,3910.33 3519.03,3910.33 3519.91,3909.45 3700.79,3909.45 3901.3,4109.96 R22.1@4005.91,4109.96
NetR23_1: R23.1 SW1.7 | length 1876.8
  Bottom Layer (.GBL) w10: SW1.7@2870.46,3763.87 3002.93,3896.33 3513.23,3896.33 3514.11,3895.45 4430.88,3895.45 4566.65,4031.22 R23.1@4635.83,4031.22
NetR24_1: R24.1 SW1.5 | length 2160.3
  Bottom Layer (.GBL) w10: SW1.5@3070.46,3763.87 3155.5,3848.9 3521.06,3848.9 3547.13,3822.83 4890.04,3822.83 R24.1@5098.43,4031.22
NetR25_1: R25.1 SW1.6 | length 2015.5
  Bottom Layer (.GBL) w10: SW1.6@2970.46,3763.87 3080.61,3874.02 3515.75,3874.02 3531.5,3858.27 4689.25,3858.27 R25.1@4862.2,4031.22
NetR26_1: R26.1 SW1.4 | length 2327.4
  Bottom Layer (.GBL) w10: SW1.4@3170.46,3763.87 3241.5,3834.9 3515.26,3834.9 3566.7,3783.46 5096.73,3783.46 R26.1@5344.49,4031.22
NetR27_1: R27.1 SW1.3 | length 2484.7
  Bottom Layer (.GBL) w10: SW1.3@3270.46,3763.87 3327.5,3820.9 3509.47,3820.9 3574.46,3755.91 5315.24,3755.91 R27.1@5590.55,4031.22
NetTP10A_1: TP10A.1 U6A.36 | length 240.8
  Top Layer (.GTL) w10: TP10A.1@2059.09,3602.32 2165.09,3602.32 2213.83,3553.59 U6A.36@2213.83,3487.74
NetTP10B_1: TP10B.1 U6B.36 | length 240.8
  Top Layer (.GTL) w10: TP10B.1@3106.34,3602.32 3212.34,3602.32 3227.8,3586.86 3261.07,3553.59 U6B.36@3261.07,3487.74
NetTP10C_1: TP10C.1 U6C.36 | length 240.8
  Top Layer (.GTL) w10: TP10C.1@4157.52,3602.32 4263.52,3602.32 4312.25,3553.59 U6C.36@4312.25,3487.74
NetTP10D_1: TP10D.1 U6D.36 | length 240.8
  Top Layer (.GTL) w10: TP10D.1@5189.02,3602.32 5295.02,3602.32 5343.75,3553.59 U6D.36@5343.75,3487.74
NetU3A_7: U3A.7 U3A.11 U5A.2 | length 523.4
  Top Layer (.GTL) w10: U3A.11@2027.09,1111.96 2042.09,1126.96 ; 2042.09,1153.68 2042.09,1126.96 ; U5A.2@2140.4,1467.12 2114.88,1467.12 2046.08,1398.32 2002.09,1398.32 1977.09,1373.32 U3A.7@1977.09,1316.68 2006.28,1287.5 2006.28,1269.65 2042.09,1233.84 2042.09,1207.12 2042.09,1126.96
NetU3B_7: U3B.7 U3B.11 U5B.2 | length 523.4
  Top Layer (.GTL) w10: U3B.11@3074.34,1111.96 3089.34,1126.96 ; 3089.34,1153.68 3089.34,1126.96 ; U5B.2@3187.65,1467.12 3162.12,1467.12 3093.33,1398.32 3049.34,1398.32 3024.34,1373.32 U3B.7@3024.34,1316.68 3053.53,1287.5 3053.53,1269.65 3089.34,1233.84 3089.34,1207.12 3089.34,1126.96
NetU3C_7: U3C.7 U3C.11 U5C.2 | length 523.4
  Top Layer (.GTL) w10: U3C.11@4125.52,1111.96 4140.52,1126.96 ; 4140.52,1153.68 4140.52,1126.96 ; U5C.2@4238.83,1467.12 4213.3,1467.12 4144.51,1398.32 4100.52,1398.32 4075.52,1373.32 U3C.7@4075.52,1316.68 4104.71,1287.5 4104.71,1269.65 4140.52,1233.84 4140.52,1207.12 4140.52,1126.96
NetU3D_7: U3D.7 U3D.11 U5D.2 | length 523.4
  Top Layer (.GTL) w10: U3D.11@5157.02,1111.96 5172.02,1126.96 ; 5172.02,1153.68 5172.02,1126.96 ; U5D.2@5270.32,1467.12 5244.8,1467.12 5176,1398.32 5132.02,1398.32 5107.02,1373.32 U3D.7@5107.02,1316.68 5136.2,1287.5 5136.2,1269.65 5172.02,1233.84 5172.02,1207.12 5172.02,1126.96
Q0: P1.2 U14.6 | length 326.8
  Top Layer (.GTL) w10: P1.2@200,3300 354.96,3300 450.63,3395.67 U14.6@487.21,3395.67
Q1: P1.4 U14.8 | length 351.9
  Top Layer (.GTL) w10: P1.4@200,3200 294.56,3200 450.86,3356.3 U14.8@487.21,3356.3
RD_N: TP24.1 U6A.41 U6B.41 U6C.41 U6D.41 U14.23 | length 5879.1
  Top Layer (.GTL) w10: U14.23@487.21,3061.02 558.02,3061.02 v1(559,3062) ; v1(1981,3312) 1981,3319.85 2017,3355.85 U6A.41@2160.68,3355.85 ; v1(3060,3330) 3060,3333.85 3082,3355.85 U6B.41@3207.92,3355.85 ; v1(4098,3329.09) 4124.76,3355.85 U6C.41@4259.1,3355.85 ; v1(5099,3334) 5120.85,3355.85 U6D.41@5290.6,3355.85
  MidLayer1 (.G1) w10: v1(559,3062) 562,3059 1728,3059 v1(1981,3312) 2034.68,3258.32 2308.79,3258.32 2380.47,3330 v1(3060,3330) 3072.21,3317.79 3117.51,3317.79 3122.3,3313 4081.91,3313 v1(4098,3329.09) 4168.77,3258.32 4343.84,3258.32 4404.52,3319 5084,3319 v1(5099,3334)
  Bottom Layer (.GBL) w10: TP24.1@4900,3550 4900,3533 v1(5099,3334)
RESET_N: J5.47 TP19.1 U6A.38 U6B.38 U6C.38 U6D.38 U14.61 | length 9359.9
  Top Layer (.GTL) w10: U14.61@1029.53,2735.24 1029.53,2652.47 1044,2638 1264,2638 1728,3102 1728,3386.54 1756.36,3414.9 U6A.38@2160.68,3414.9 ; v1@2997,3414.9 U6B.38@3207.92,3414.9 ; J5.47@3921.52,465.23 J5.47@3923.91,462.85 3923.91,533.09 3921.52,535.48 3921.52,803.02 3923.91,805.41 3923.91,1398.21 3868.52,1453.59 3868.52,2990.52 v1(3972,3094) ; v1@4074,3414.9 U6C.38@4259.1,3414.9 ; TP19.1@4900,2800 4900,2930.7 4851,2979.7 4851,3270.3 4995.61,3414.9 v1(5071,3414.9) U6D.38@5290.6,3414.9
  MidLayer1 (.G1) w10: v1(1935,3417) 1959.32,3441.32 2971.68,3441.32 v1(2997,3416) 3022.32,3441.32 4047.68,3441.32 v1(4074,3415) 4100.32,3441.32 5044.58,3441.32 v1(5071,3414.9)
  Bottom Layer (.GBL) w10: v1(3972,3094) 3972,3313 v1(4074,3415)
S_WIRED_1: J5.45 U15.1 | length 1423.1
  Top Layer (.GTL) w10: v1(3946,535) 3948.91,532.09 J5.45@3948.91,462.85 ; v1(5221,501) 5271,501 U15.1@5273,503
  Bottom Layer (.GBL) w10: v1(3946,535) 3953,542 4553.2,542 4555.7,544.5 5099.5,544.5 5143,501 v1(5221,501)
SCLK: J5.143 TP11.1 U9.10 U14.20 | length 4630.2
  Top Layer (.GTL) w10: v1(431,3118) 433.08,3120.08 U14.20@487.21,3120.08 ; v1(784,1676) 787,1673 951.15,1673 U9.10@953.74,1675.59 ; J5.143@2343.41,461.79 2343.41,519.59 2411.81,588 2471,588 v1(2478.74,595.74)
  MidLayer1 (.G1) w10: v1(431,3118) 330,3017 330,1864.3 518.3,1676 v1(784,1676) 784,1518.3 866.86,1435.44 ; TP11.1@800,1350 800,1368.58 866.86,1435.44 ; 2444,596 2444.26,595.74 ; v1(2478.74,595.74) 2444.26,595.74 ; 866.86,1435.44 888.3,1414 921.67,1414 949.83,1385.83 1574,761.7 1574,760.4 1696.4,638 2169.8,638 2212.06,595.74 2444.26,595.74
SEL0: P1.1 U14.5 | length 435
  Top Layer (.GTL) w10: P1.1@100,3300 145.51,3300 184.04,3338.53 373.69,3338.53 450.52,3415.35 U14.5@487.21,3415.35
SEL1: P1.3 U14.7 | length 460.1
  Top Layer (.GTL) w10: P1.3@100,3200 145.51,3200 184.04,3238.53 313.29,3238.53 450.74,3375.98 U14.7@487.21,3375.98
SEL2: P1.5 U14.11 | length 501.5
  Top Layer (.GTL) w10: P1.5@100,3100 145.51,3100 184.04,3061.47 215.96,3061.47 238.53,3084.04 238.53,3085.26 450.52,3297.24 U14.11@487.21,3297.24
SIMO: J5.147 TP12.1 U9.11 | length 2839.9
  Top Layer (.GTL) w10: v1(800,1150) 898.5,1248.5 v1(898.5,1435.5) 898.5,1611.5 897.5,1612.5 940.91,1655.91 U9.11@953.74,1655.91 ; J5.147@2293.41,461.79 2293,462.2 2293,516.7 2313.3,537 2341,537 2407,603 2456,603 v1(2507.5,654.5)
  MidLayer1 (.G1) w10: v1(898.5,1435.5) 920,1435.5 1588,767.5 1588,766.2 1702.2,652 2505,652 v1(2507.5,654.5)
SOMI: J5.149 TP13.1 U9.9 | length 3168
  Top Layer (.GTL) w10: v1(924,1694) 925.28,1695.28 U9.9@953.74,1695.28 ; J5.149@2268.41,461.79 2268.41,523.41 2300,555 2332,555 2423,646 2451,646 v1(2488,683)
  MidLayer1 (.G1) w10: v1(864,1468) 907.3,1468 1602,773.3 1602,772 1708,666 2183,666 2200,683 v1(2488,683)
  Bottom Layer (.GBL) w10: TP13.1@800,950 864,1014 v1(864,1468) 827,1505 827,1570 827.73,1570 924,1666.27 v1(924,1694)
START_ACQ: P1.7 U14.12 | length 502.9
  Top Layer (.GTL) w10: P1.7@100,3000 145.51,3000 184.04,3038.53 212.81,3038.53 252.53,3078.24 252.53,3079.46 450.63,3277.56 U14.12@487.21,3277.56
TCK: P3.1 RN1.1 U14.35 | length 1266.4
  Top Layer (.GTL) w10: P3.1@100,2000 151,2051 373,2051 424,2000 RN1.1@453.94,2000 ; v1(421,2816) 429.8,2824.8 U14.35@487.21,2824.8
  Bottom Layer (.GBL) w10: v1(396,2026) 396,2791 v1(421,2816)
TDI: P3.9 RN1.7 U14.34 | length 1598.7
  Top Layer (.GTL) w10: P3.9@100,1600 146,1646 200.49,1646 278,1723.51 278,1729.57 RN1.7@453.94,1905.51 ; v1(415,2854) 424.51,2844.49 U14.34@487.21,2844.49
  Bottom Layer (.GBL) w10: v1(387,1837) 387,1949.3 375,1961.3 375,2814 v1(415,2854)
TDO: P3.3 RN1.3 U14.36 | length 1275.2
  Top Layer (.GTL) w10: P3.3@100,1900 161.47,1961.47 215.96,1961.47 222.99,1968.5 RN1.3@453.94,1968.5 ; v1(436,2786) 455.12,2805.12 U14.36@487.21,2805.12
  Bottom Layer (.GBL) w10: v1(398,1968) 436,2006 v1(436,2786)
TMS: P3.5 RN1.5 U14.33 | length 1530.7
  Top Layer (.GTL) w10: P3.5@100,1800 148,1848 328,1848 417.01,1937.01 RN1.5@453.94,1937.01 ; v1(385,2872) 388,2875 434.35,2875 445.17,2864.17 U14.33@487.21,2864.17
  Bottom Layer (.GBL) w10: v1(351,1874) 351,2838 v1(385,2872)